# Altium PCB MB_RELAY.PcbDoc
Units mm, origin at the board's own origin, x right, y up, seen from the top; angles counter-clockwise.
Board outline 132.99 x 83.97 mm, 2 copper layers (Top Layer, Bottom Layer); 36 components, 46 nets, 228 pads, 0 vias.
Unrouted connection lines stored in the file: 22.
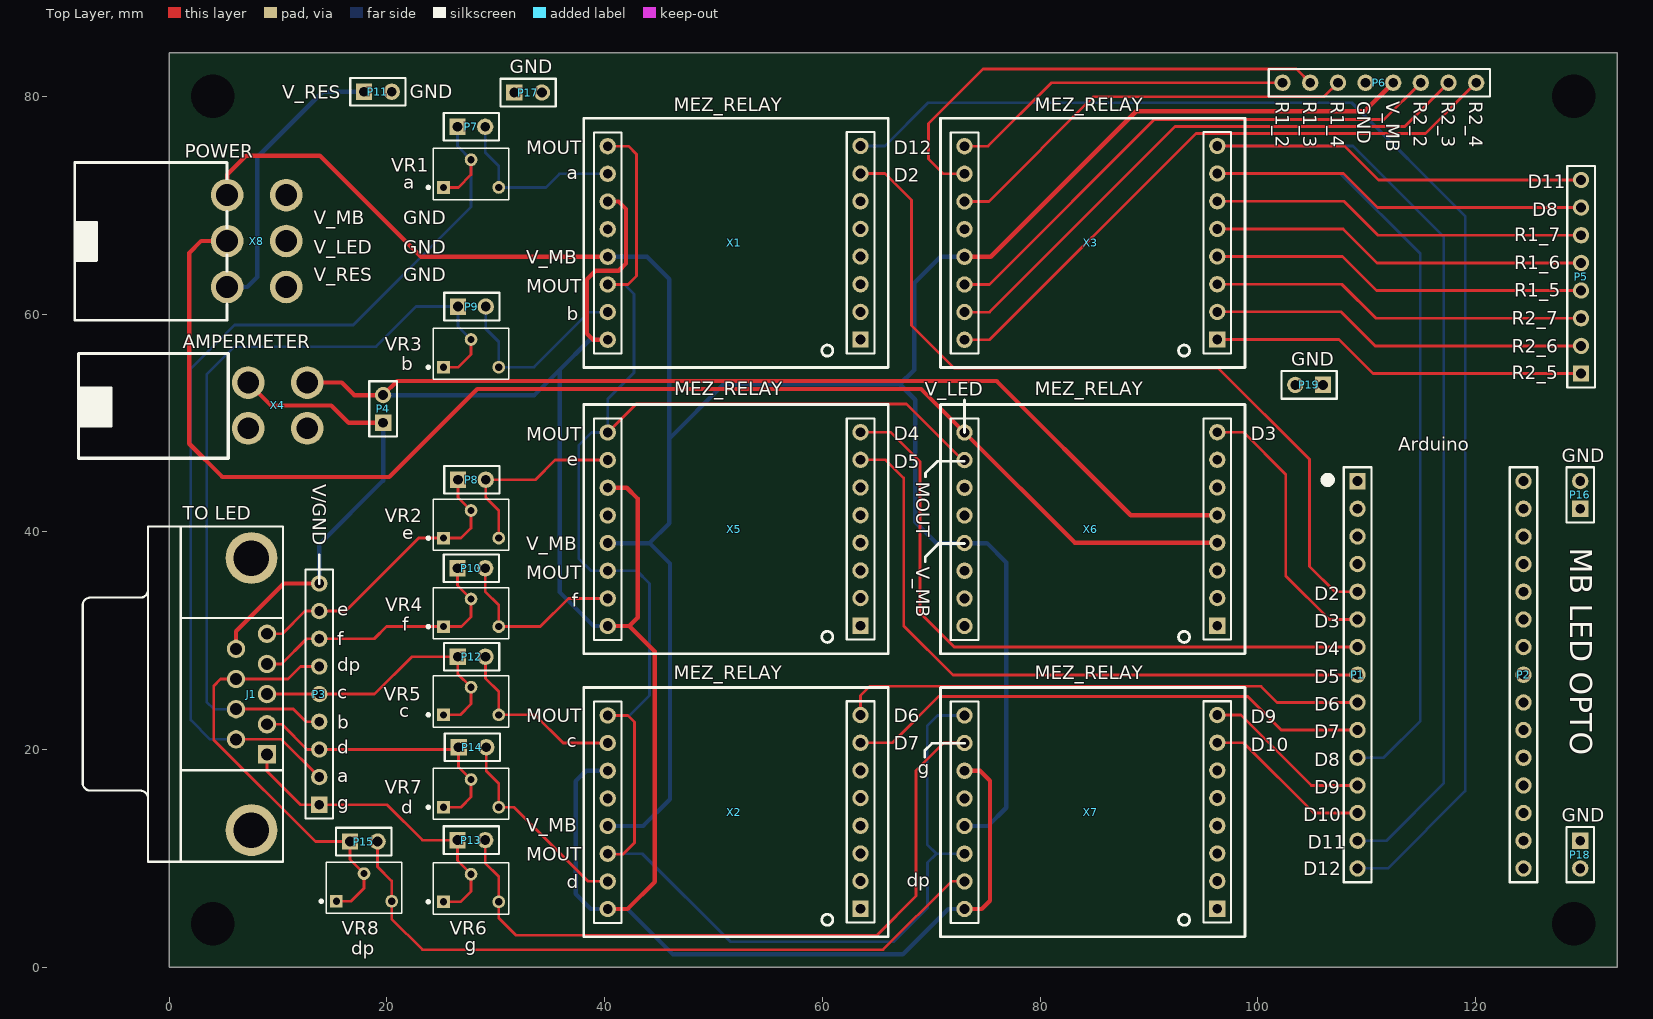
[diagram p0: Top Layer view]
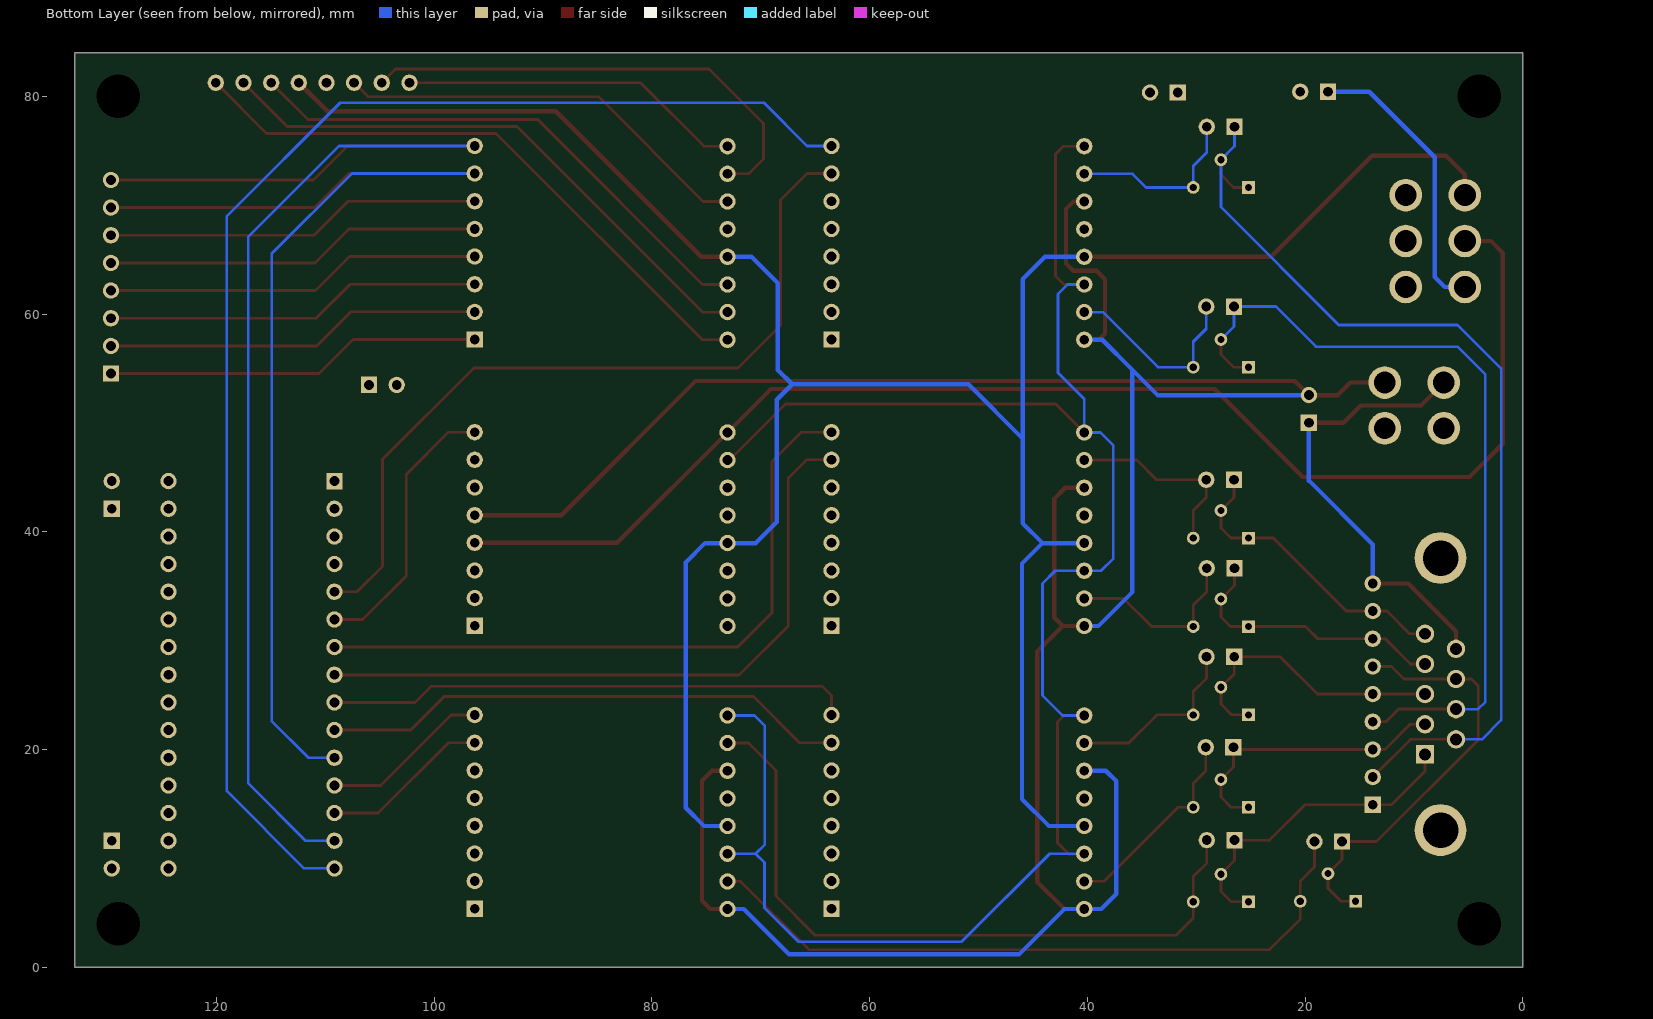
[diagram p1: Bottom Layer view, seen from below]

## Layer stack, top to bottom
Top Solder: solder mask 0.0102, Solder Resist, Dk 3.5
Top Layer: signal copper 0.0356
Dielectric 1: dielectric 0.32, FR-4, Dk 4.8
Bottom Layer: signal copper 0.0356
Bottom Solder: solder mask 0.0102, Solder Resist, Dk 3.5

## Board outline
0,83.972 0,0 132.994,0 132.994,83.972

## Design rules (kind name [scope] priority, off if disabled: settings)
Clearance Clearance_1 [All] p1: gap=0.254 ignorepadtopadclearanceinfootprint=FALSE except(0: Arc-Hole Track-Hole SMDPad-Hole THPad-Hole Via-Hole Fill-Hole Poly-Hole Region-Hole Text-Hole)
Clearance [All] p2: gap=0.254 ignorepadtopadclearanceinfootprint=FALSE except(0: Arc-Hole Track-Hole SMDPad-Hole THPad-Hole Via-Hole Fill-Hole Poly-Hole Region-Hole Text-Hole)
PolygonConnect [All] p1: connectstyle=Relief reliefconductorwidth=0.254 reliefentries=4 polygonreliefangle="90 Angle" airgapwidth=0.254
RoutingVias [All] p1: holewidth=0.711 width=1.27 viastyle="Through Hole" minholewidth=0.711 minwidth=1.27 maxholewidth=0.711 maxwidth=1.27
SolderMaskExpansion [All] p1: expansion=0.102 istentingtop=FALSE
Width [All] p1: maxlimit=0.6 minlimit=0.254 preferedwidth=0.4 minimp=50.000000 maximp=50.000000 favimp=50.000000
30 further rules are at their usual default settings.

## Components (designator, comment, footprint, x,y, rotation, side; value= is the part's Value field where it differs from the comment)
J1 "D Connector 9" DSUB1.385-2H9 -1.928,25.097 r90 top
P1 "Header 15" HDR1X15#1 109.144,9.093 r90 top
P2 "Header 15" HDR1X15#2 124.384,9.093 r90 top
P3 "Header 9" HDR1X9 13.792,14.935 r90 top
P4 "Header 2" HDR1X2 19.66,50.013 r90 top
P5 "Header 8" HDR1X8#1 129.671,72.314 r270 top
P6 "Header 8" HDR1X8#2 120.036,81.237 r180 top
P7 "Header 2" HDR1X2 26.492,77.191 r0 top
P8 "GND" HDR1X2 26.543,44.78 r0 top
P9 "Header 2" HDR1X2 26.543,60.681 r0 top
P10 "GND" HDR1X2 26.492,36.652 r0 top
P11 "Header 2" HDR1X2 17.907,80.416 r0 top
P12 "Header 2" HDR1X2 26.518,28.524 r0 top
P13 "GND" HDR1X2 26.492,11.684 r0 top
P14 "Header 2" HDR1X2 26.594,20.218 r0 top
P15 "GND" HDR1X2 16.612,11.557 r0 top
P16 "GND" HDR1X2 129.591,42.113 r90 top
P17 "GND" HDR1X2 31.699,80.34 r0 top
P18 "GND" HDR1X2 129.591,11.633 r270 top
P19 "GND" HDR1X2 105.969,53.492 r180 top
VR1 "RES 3266W" "RES 3266W" 25.197,71.628 r0 top
VR2 "RES 3266W" "RES 3266W" 25.197,39.421 r0 top
VR3 "RES 3266W" "RES 3266W" 25.197,55.118 r0 top
VR4 "RES 3266W" "RES 3266W" 25.197,31.293 r0 top
VR5 "RES 3266W" "RES 3266W" 25.197,23.19 r0 top
VR6 "RES 3266W" "RES 3266W" 25.197,6.02 r0 top
VR7 "RES 3266W" "RES 3266W" 25.197,14.707 r0 top
VR8 "RES 3266W" "RES 3266W" 15.367,6.071 r0 top
X1 "MEZ_RELAY" MEZ_RELAY 63.5,57.658 r180 top
X2 "MEZ_RELAY" MEZ_RELAY 63.5,5.385 r180 top
X3 "MEZ_RELAY" MEZ_RELAY 96.266,57.658 r180 top
X4 "AMP_VOLTMETR" AMP_VOLTMETER 12.687,53.705 r270 top
X5 "MEZ_RELAY" MEZ_RELAY 63.5,31.369 r180 top
X6 "MEZ_RELAY" MEZ_RELAY 96.266,31.369 r180 top
X7 "MEZ_RELAY" MEZ_RELAY 96.266,5.385 r180 top
X8 "POWER" POWER 5.334,70.919 r90 top

## Footprints (in the part's own frame and the unit in brackets; to place one, negate y for a bottom-side part, rotate by r counter-clockwise, add the part's x,y. Pads: shape width x height; smd on the part's side, far side on the other; paste and mask are expansions set on the pad)
AMP_VOLTMETER [mm] "AMP_VOLTMETER"
  round 3 hole 2: 1(0,0) 2(0,-5.423) 3(4.2,-5.423) 4(4.2,0)
  silkscreen extent -2.66,-21 6.94,-7.25
DSUB1.385-2H9 [mm] "Connector; D Subminiature; 9 Position; Right Angle; Pitch 1.385 mm"
  rect 1.69x1.69 hole 1.09: 1(-5.54,-10.92)
  round 1.69 hole 1.09: 2(-2.77,-10.92) 3(0,-10.92) 4(2.77,-10.92) 5(5.54,-10.92) 6(-4.155,-8.08) 7(-1.385,-8.08) 8(1.385,-8.08) 9(4.155,-8.08)
  round 4.76 hole 3.26: 10(-12.495,-9.5) 11(12.495,-9.5)
  silkscreen extent -15.4,-12.4 15.4,6
HDR1X2 [mm] "Connector; Header; 2 Position"
  rect 1.5x1.5 hole 0.9: 1(0,0)
  round 1.5 hole 0.9: 2(2.54,0)
  silkscreen extent -1.27,-1.27 3.81,1.27
HDR1X8#1 [mm] "Connector; Header; 8 Position"
  round 1.5 hole 0.9: 1(0,0) 2(2.54,0) 3(5.08,0) 4(7.62,0) 5(10.16,0) 6(12.7,0) 7(15.24,0)
  rect 1.5x1.5 hole 0.9: 8(17.78,0)
  silkscreen extent -1.27,-1.27 19.05,1.27
HDR1X8#2 [mm] "Connector; Header; 8 Position"
  round 1.5 hole 0.9: 1(0,0) 2(2.54,0) 3(5.08,0) 4(7.62,0) 5(10.16,0) 6(12.7,0) 7(15.24,0) 8(17.78,0)
  silkscreen extent -1.27,-1.27 19.05,1.27
HDR1X9 [mm] "Connector; Header; 9 Position"
  rect 1.5x1.5 hole 0.9: 1(0,0)
  round 1.5 hole 0.9: 2(2.54,0) 3(5.08,0) 4(7.62,0) 5(10.16,0) 6(12.7,0) 7(15.24,0) 8(17.78,0) 9(20.32,0)
  silkscreen extent -1.27,-1.27 21.59,1.27
HDR1X15#1 [mm] "Connector; Header; 15 Position"
  round 1.5 hole 0.9: 1(0,0) 2(2.54,0) 3(5.08,0) 4(7.62,0) 5(10.16,0) 6(12.7,0) 7(15.24,0) 8(17.78,0) 9(20.32,0) 10(22.86,0) 11(25.4,0) 12(27.94,0) 13(30.48,0) 14(33.02,0)
  rect 1.5x1.5 hole 0.9: 15(35.56,0)
  silkscreen extent -1.27,-1.27 36.83,1.27
HDR1X15#2 [mm] "Connector; Header; 15 Position"
  round 1.5 hole 0.9: 1(0,0) 2(2.54,0) 3(5.08,0) 4(7.62,0) 5(10.16,0) 6(12.7,0) 7(15.24,0) 8(17.78,0) 9(20.32,0) 10(22.86,0) 11(25.4,0) 12(27.94,0) 13(30.48,0) 14(33.02,0) 15(35.56,0)
  silkscreen extent -1.27,-1.27 36.83,1.27
MEZ_RELAY [mm] "мезонин реле"
  rect 1.5x1.5 hole 0.9: 1(0,0)
  round 1.5 hole 0.9: 2(0,-2.54) 3(0,-5.08) 4(0,-7.62) 5(0,-10.16) 6(0,-12.7) 7(0,-15.24) 8(0,-17.78) 9(23.216,-17.755) 10(23.216,-15.215) 11(23.216,-12.675) 12(23.216,-10.135) 13(23.216,-7.595) 14(23.216,-5.055) 15(23.216,-2.515) 16(23.216,0.025)
  silkscreen extent -2.54,-20.32 25.43,2.57
POWER [mm] "POWER"
  round 3 hole 2: 1(0,0) 2(-4.217,0) 3(-8.435,0) 4(0,-5.422) 5(-4.217,-5.422) 6(-8.435,-5.422)
  silkscreen extent -11.5,0 3,14
"RES 3266W" [mm]
  rect 1.168x1.168 hole 0.66: 1(0,0)
  round 1.168 hole 0.66: 2(2.54,2.54) 3(5.08,0)
  silkscreen extent -1.48,-1.12 5.99,3.58, body extent -0.81,-1.02 5.89,3.48, height 8.77

## Part data
J1: "Receptacle Assembly, 9 Position, Right Angle", PackageDocument=O, DatasheetDocument=1-Sep-1999, Gender=Receptacle, LatestRevisionDate=17-Jul-2002, LatestRevisionNote="Re-released for DXP Platform.", Orientation="Right Angle", PackageReference=788750, Positions=9, Published=15-Jun-2001, Publisher="Altium Limited"
P1 P2: "Header, 15-Pin", LatestRevisionDate=17-Jul-2002, LatestRevisionNote="Re-released for DXP Platform.", Publisher="Altium Limited"
P3: "Header, 9-Pin", LatestRevisionDate=17-Jul-2002, LatestRevisionNote="Re-released for DXP Platform.", Publisher="Altium Limited"
P4 P7 P9 P11 P12 P14: "Header, 2-Pin", LatestRevisionDate=17-Jul-2002, LatestRevisionNote="Re-released for DXP Platform.", Publisher="Altium Limited"
P5 P6: "Header, 8-Pin", LatestRevisionDate=17-Jul-2002, LatestRevisionNote="Re-released for DXP Platform.", Publisher="Altium Limited"
P8 P10 P13 P15 P16 P17 P18 P19: library part "Header 2", "Header, 2-Pin", LatestRevisionDate=17-Jul-2002, LatestRevisionNote="Re-released for DXP Platform.", Publisher="Altium Limited"

## Free pads (board coordinates)
  round 0 hole 4: 0(4,80) 0(129,4) 0(129,80) 2(4,4)

## Nets (pads, with @x,y where several pads share a name; then routed paths per layer and width w, separated by ;. In a path a pad name is that pad's centre, name@x,y a point inside that pad or via, vN(x,y) a via of type N, cw(c..) or ccw(c..) an arc to the next point about the centre after c; other vN are vias at no path point)
a: J1.6 P3.2 P7.1 VR1.1 VR1.2 | length 90.4
  Top Layer w0.254: J1.6 10.326,20.942 P3.2 ; VR1.1 26.568,71.628 27.737,72.796 VR1.2
  Bottom Layer w0.254: J1.6 3.773,20.942 2,22.714 2,55 6,59 16.912,59 27.737,69.825 VR1.2 26.492,75.413 P7.1
a_1: P7.2 VR1.3 X1.10 | length 16.6
  Bottom Layer w0.254: P7.2 29.032,74.854 30.277,73.609 VR1.3 34.62,71.628 35.865,72.873 X1.10
b: J1.7 P3.4 P9.1 VR3.1 VR3.2 | length 74.8
  Top Layer w0.254: J1.7 6.164,23.724 11.405,23.724 12.573,22.555 P3.4 ; VR3.1 26.568,55.118 27.737,56.286 VR3.2
  Bottom Layer w0.254: J1.7 4.127,23.712 3.454,24.384 3.454,54.454 6,57 19,57 22.681,60.681 P9.1 26.543,58.852 VR3.2
b_1: P9.2 VR3.3 X1.15 | length 18.2
  Bottom Layer w0.254: P9.2 29.083,58.649 30.277,57.455 VR3.3 33.528,55.118 38.583,60.173 X1.15
c: J1.3 P3.5 P12.1 VR5.1 VR5.2 | length 26.7
  Top Layer w0.254: J1.3 13.791,25.097 P3.5 18.872,25.095 22.301,28.524 P12.1 26.518,26.949 VR5.2 27.737,24.181 26.746,23.19 VR5.1
c_1: P12.2 VR5.3 X2.10 | length 16.9
  Top Layer w0.254: P12.2 29.058,26.543 30.277,25.324 VR5.3 33.61,23.19 36.201,20.599 X2.10
d: J1.2 P3.3 P14.1 VR7.1 VR7.2 | length 26.3
  Top Layer w0.254: J1.2 10.363,22.327 12.675,20.015 P3.3 26.594,20.015 26.594,18.39 VR7.2 27.737,15.646 26.797,14.707 VR7.1
d_1: P14.2 VR7.3 X2.15 | length 18.8
  Top Layer w0.254: P14.2 29.134,18.034 30.277,16.891 VR7.3 31.693,14.707 38.501,7.899 X2.15
dp: J1.8 P3.6 P15.1 VR8.1 VR8.2 | length 39.6
  Top Layer w0.254: P3.6 12.065,27.635 10.911,26.482 J1.8 4.732,26.482 4.104,25.854 4.104,20.896 13.443,11.557 P15.1 16.612,9.906 VR8.2 17.907,7.264 16.713,6.071 VR8.1
dp_1: P15.2 VR8.3 X7.15 | length 64
  Top Layer w0.254: P15.2 19.152,9.246 20.447,7.95 VR8.3 20.447,4.453 23.274,1.626 65.583,1.626 71.857,7.899 X7.15
e: J1.5 P3.8 P8.1 VR2.1 VR2.2 | length 27.7
  Top Layer w0.254: J1.5 10.418,30.637 12.497,32.715 P3.8 16.231,32.715 22.936,39.421 VR2.1 26.822,39.421 27.737,40.335 VR2.2 26.543,43.155 P8.1
e_1: P8.2 VR2.3 X5.10 | length 17.8
  Top Layer w0.254: VR2.3 30.277,41.973 29.083,43.167 P8.2 33.655,44.78 35.458,46.584 X5.10
f: J1.4 P3.7 P10.1 VR4.1 VR4.2 | length 25.5
  Top Layer w0.254: J1.4 10.341,27.867 12.649,30.175 P3.7 18.847,30.175 19.964,31.293 VR4.1 26.848,31.293 27.737,32.182 VR4.2 26.492,35.077 P10.1
f_1: P10.2 VR4.3 X5.15 | length 17
  Top Layer w0.254: P10.2 29.032,34.519 30.277,33.274 VR4.3 34.087,31.293 36.678,33.884 X5.15
g: J1.1 P3.1 P13.1 VR6.1 VR6.2 | length 29.8
  Top Layer w0.254: J1.1 8.992,18.008 12.065,14.935 P3.1 20.015,14.935 23.266,11.684 P13.1 26.492,9.804 VR6.2 27.737,6.985 26.772,6.02 VR6.1
g_1: P13.2 VR6.3 X7.10 | length 65.2
  Top Layer w0.254: P13.2 29.032,9.601 30.277,8.357 VR6.3 30.277,4.523 31.854,2.946 64.999,2.946 68.605,6.553 68.605,18.085 71.12,20.599 X7.10
GND: P1.12 P2.14 P6.5 P11.2 P16.1 P16.2 P17.1 P17.2 P18.1 P18.2 P19.1 P19.2 X1.12 X2.12 X3.12 X5.12 X6.6 X6.11 X6.12 X7.12 X8.4 X8.5 X8.6
IN1: P1.1 X1.8 | length 127.1
  Bottom Layer w0.254: X1.8 65.735,75.438 69.698,79.4 108.61,79.4 119.024,68.986 119.024,16.18 111.938,9.093 P1.1
IN2: P1.11 X1.7 | length 74
  Top Layer w0.254: X1.7 65.735,72.898 68.174,70.46 68.174,58.953 72.085,55.042 96.342,55.042 104.724,46.66 104.724,36.83 107.061,34.493 P1.11
IN3: P1.7 X2.8 | length 48.4
  Top Layer w0.254: X2.8 63.5,24.968 64.338,25.806 100.279,25.806 101.752,24.333 P1.7
IN4: P1.6 X2.7 | length 48.7
  Top Layer w0.254: X2.7 66.421,20.625 70.663,24.867 99.06,24.867 102.133,21.793 P1.6
IN5: P1.9 X5.8 | length 62
  Top Layer w0.254: X5.8 66.269,49.149 68.961,46.457 68.961,32.563 72.111,29.413 P1.9
IN6: P1.8 X5.7 | length 61.8
  Top Layer w0.254: X5.7 65.811,46.609 67.462,44.958 67.462,31.369 71.984,26.848 P1.8@109.144,26.848
IN7: P1.4 X7.8 | length 15.6
  Top Layer w0.254: X7.8 98.45,23.165 104.902,16.713 P1.4
IN8: P1.3 X7.7 | length 15.6
  Top Layer w0.254: X7.7 98.679,20.625 105.131,14.173 P1.3
IN9: P1.10 X6.8 | length 25.5
  Top Layer w0.254: X6.8 98.679,49.149 102.54,45.288 102.54,35.966 106.553,31.953 P1.10
IN10: P1.2 P5.1 X3.8 | length 119.2
  Top Layer w0.254: X3.8 107.95,75.438 111.074,72.314 P5.1
  Bottom Layer w0.254: X3.8 108.712,75.438 117.069,67.081 117.069,16.916 111.785,11.633 P1.2
IN11: P1.5 P5.2 X3.7 | length 106.5
  Top Layer w0.254: X3.7 107.848,72.898 110.973,69.774 P5.2
  Bottom Layer w0.254: X3.7 107.544,72.898 114.91,65.532 114.91,22.631 111.531,19.253 P1.5
MASTER_OUT: X1.9 X1.14 X2.9 X2.14 X5.9 X5.14 X6.10 X7.9 X7.14 | length 179.9
  Top Layer w0.254: X2.9 42.139,23.139 42.748,22.53 42.748,11.448 41.689,10.389 X2.14@40.335,10.389 ; X5.9 42.901,51.74 67.716,51.74 72.873,46.584 X6.10 ; X1.14 42.139,62.713 42.926,63.5 42.926,74.676 42.189,75.413 X1.9
  Bottom Layer w0.254: X2.14 43.461,10.439 51.538,2.362 66.548,2.362 69.647,5.461 69.647,9.627 70.46,10.439 ; X2.9 42.291,23.139 44.12,24.968 44.12,35.255 42.951,36.424 X5.14 38.76,36.424 37.617,37.567 37.617,47.93 38.811,49.124 X5.9 40.284,52.197 42.697,54.61 42.697,61.849 41.834,62.713 X1.14 ; X7.14 70.46,10.439 ; X7.9 70.587,23.139 69.621,22.174 69.621,11.278 70.46,10.439
R1_2: P6.8 X3.9 | length 31.6
  Top Layer w0.254: X3.9 75.218,75.413 81.042,81.237 P6.8
R1_3: P6.7 X3.10 | length 44.8
  Top Layer w0.254: X3.10 71.127,72.873 69.75,74.25 69.75,77.5 74.75,82.5 103.533,82.5 P6.7
R1_4: P6.6 X3.11 | length 38.8
  Top Layer w0.254: X3.11 75.286,70.333 84.912,79.959 106.058,79.959 P6.6
R1_5: P5.5 X3.4 | length 34.7
  Top Layer w0.254: X3.4 107.772,65.278 110.896,62.154 P5.5
R1_6: P5.4 X3.5 | length 34.7
  Top Layer w0.254: X3.5 107.823,67.818 110.947,64.694 P5.4
R1_7: P5.3 X3.6 | length 34.7
  Top Layer w0.254: X3.6 107.899,70.358 111.023,67.234 P5.3
R2_2: P6.3 X3.14 | length 49.6
  Top Layer w0.254: X3.14 75.336,62.713 90.475,77.851 111.57,77.851 P6.3
R2_3: P6.2 X3.15 | length 53.2
  Top Layer w0.254: X3.15 75.336,60.173 92.38,77.216 113.475,77.216 P6.2
R2_4: P6.1 X3.16 | length 56.8
  Top Layer w0.254: X3.16 75.362,57.633 94.31,76.581 115.38,76.581 P6.1
R2_5: P5.8 X3.1 | length 34.7
  Top Layer w0.254: X3.1 107.442,57.658 110.566,54.534 P5.8
R2_6: P5.7 X3.2 | length 34.7
  Top Layer w0.254: X3.2 107.645,60.198 110.769,57.074 P5.7
R2_7: P5.6 X3.3 | length 34.7
  Top Layer w0.254: X3.3 107.696,62.738 110.82,59.614 P5.6
V_LED: X6.4 X6.9 X8.2 | length 126.3
  Top Layer w0.4: X8.2 2.947,66.701 1.854,65.608 1.854,48.082 4.902,45.034 20.218,45.034 28.296,53.111 69.063,53.111 X6.9 83.185,38.989 X6.4
V_LED/GND_FROM_A: P4.2 X1.11 X1.16 X2.11 X2.16 X4.1 X5.11 X5.16 X6.5 X7.11 X7.16 | length 273.6
  Top Layer w0.4: X4.1 15.866,53.705 17.018,52.553 P4.2 20.955,53.848 75.997,53.848 88.316,41.529 X6.5 ; X2.16 42.113,5.359 44.602,7.849 44.602,29.007 42.266,31.344 ; X5.16 42.266,31.344 ; X5.11 42.037,44.044 43.028,43.053 43.028,32.106 42.266,31.344 ; X1.16 38.938,57.633 38.379,58.191 38.379,63.195 39.167,63.983 41.3,63.983 41.961,64.643 41.961,69.647 41.275,70.333 X1.11 ; X7.16 74.625,5.359 75.387,6.121 75.387,17.145 74.473,18.059 X7.11
  Bottom Layer w0.4: P4.2 33.553,52.553 35.865,54.864 ; X2.11 38.303,18.059 37.338,17.094 37.338,6.756 38.735,5.359 X2.16 42.113,5.359 46.279,1.194 67.386,1.194 71.552,5.359 X7.16 ; X5.16 38.989,31.344 35.865,34.468 35.865,54.864 ; X1.16 38.633,57.633 35.865,54.864
V_LED/GND_TO_A: J1.9 P3.9 P4.1 X4.2 | length 42.2
  Top Layer w0.4: J1.9 6.152,30.866 10.541,35.255 P3.9 ; X4.2 9.369,51.6 14.9,51.6 16.487,50.013 P4.1
  Bottom Layer w0.4: P3.9 13.792,38.837 19.66,44.704 P4.1
V_MB: P6.4 X1.13 X2.13 X3.13 X5.13 X6.13 X7.13 X8.1 | length 242.6
  Top Layer w0.4: X8.1 5.334,72.796 7.087,74.549 13.843,74.549 23.139,65.253 X1.13 ; X3.13 75.463,65.253 88.824,78.613 109.792,78.613 P6.4
  Bottom Layer w0.4: X5.13 44.12,38.964 ; X1.13 43.891,65.253 45.949,63.195 45.949,48.565 ; X2.13@40.31,12.979 43.536,12.979 45.999,15.443 45.999,37.084 44.12,38.964 ; X7.13 75.209,12.979 76.886,14.656 76.886,37.186 75.108,38.964 X6.13 70.46,38.964 68.529,40.894 68.529,52.121 67.107,53.543 ; X3.13 70.841,65.253 68.428,62.84 68.428,54.864 67.107,53.543 ; 44.12,38.964 45.949,40.792 45.949,48.565 ; 45.949,48.565 50.927,53.543 67.107,53.543
V_RESERVE: P11.1 X8.3 | length 26.4
  Bottom Layer w0.4: X8.3 7.184,62.484 8.1,63.4 8.1,74.394 14.122,80.416 P11.1
pads on no net: J1.10 J1.11 P1.13 P1.14 P1.15 P2.1 P2.2 P2.3 P2.4 P2.5 P2.6 P2.7 P2.8 P2.9 P2.10 P2.11 P2.12 P2.13 P2.15 X1.1 X1.2 X1.3 X1.4 X1.5 X1.6 X2.1 X2.2 X2.3 X2.4 X2.5 X2.6 X4.3 X4.4 X5.1 X5.2 X5.3 X5.4 X5.5 X5.6 X6.1 X6.2 X6.3 X6.7 X6.14 X6.15 X6.16 X7.1 X7.2 X7.3 X7.4 X7.5 X7.6

## Polygon pours and split planes (outlines as drawn)
no net on Bottom Layer "NONET_L02_P-001" (solid, remove dead copper, pour order 44): 0.076,84.049 0.125,84 0.028,84

## Other copper
Bottom Layer:
  pour cut-out: 0,0 0,8 8,8 8,0
  pour cut-out: 133,0 133,8 125,8 125,0
  pour cut-out: 133,84 133,76 125,76 125,84
  pour cut-out: 0,76 8,76 8,84 0,84

## Silkscreen, mask and mechanical layers (free items; w line width, h text height)
Top Overlay:
  lines w0.254: 13.792,35.255 13.792,37.871 ; 69.4,19.3 69.4,19.9 70.074,20.574 73.05,20.574 ; 69.444,37.25 69.444,37.694 70.688,38.938 73.05,38.938 ; 69.472,45.061 69.472,45.399 70.555,46.482 73.025,46.482 ; 73.05,49.124 73.05,52.1
  lines w1.1: 106.503,44.771 cw(c106.403,44.771) 106.502,44.78
  text "GND" at 22.123,79.807 h1.25
  text "V_RES" at 10.389,79.781 h1.25
  text "R1_2" at 101.621,79.553 h1.25 r270
  text "R1_3" at 104.161,79.553 h1.25 r270
  text "R1_4" at 106.701,79.553 h1.25 r270
  text "GND" at 109.114,79.553 h1.25 r270
  text "V_MB" at 111.781,79.553 h1.25 r270
  text "R2_2" at 114.321,79.553 h1.25 r270
  text "R2_3" at 116.861,79.553 h1.25 r270
  text "R2_4" at 119.401,79.553 h1.25 r270
  text "D12" at 66.573,74.676 h1.25
  text "MOUT" at 32.794,74.651 h1.25
  text "a" at 36.543,72.365 h1.25
  text "D2" at 66.573,72.136 h1.25
  text "D11" at 124.782,71.552 h1.25
  text "a" at 21.514,71.526 h1.25
  text "D8" at 125.198,68.994 h1.25
  text "V_MB" at 13.31,68.25 h1.25
  text "GND" at 21.488,68.25 h1.25
  text "R1_7" at 123.532,66.69 h1.25
  text "V_LED" at 13.31,65.557 h1.25
  text "GND" at 21.488,65.557 h1.25
  text "V_MB" at 32.794,64.618 h1.25
  text "R1_6" at 123.532,64.132 h1.25
  text "V_RES" at 13.31,62.992 h1.25
  text "GND" at 21.488,62.992 h1.25
  text "MOUT" at 32.794,61.951 h1.25
  text "R1_5" at 123.532,61.573 h1.25
  text "b" at 36.543,59.411 h1.25
  text "R2_7" at 123.324,59.015 h1.25
  text "AMPERMETER" at 1.245,56.845 h1.25
  text "R2_6" at 123.324,56.457 h1.25
  text "b" at 21.336,54.813 h1.25
  text "R2_5" at 123.324,54.013 h1.25
  text "V_LED" at 69.418,52.502 h1.25
  text "D4" at 66.573,48.387 h1.25
  text "D3" at 99.322,48.387 h1.25
  text "MOUT" at 32.794,48.362 h1.25
  text "Arduino" at 112.878,47.447 h1.25
  text "e" at 36.543,46.076 h1.25
  text "D5" at 66.573,45.847 h1.25
  text "MOUT" at 68.605,44.605 h1.25 r270
  text "V/GND" at 13.183,44.348 h1.25 r270
  text "TO LED" at 1.237,41.123 h1.25
  text "e" at 21.438,39.294 h1.25
  text "MB LED OPTO" at 128.676,38.532 h2 r270
  text "V_MB" at 32.794,38.329 h1.25
  text "V_MB" at 68.605,36.797 h1.25 r270
  text "MOUT" at 32.794,35.662 h1.25
  text "D2" at 105.186,33.731 h1.25
  text "f" at 36.959,33.122 h1.25
  text "e" at 15.469,32.299 h1.25
  text "D3" at 105.186,31.191 h1.25
  text "f" at 21.412,30.912 h1.25
  text "f" at 15.469,29.566 h1.25
  text "D4" at 105.186,28.651 h1.25
  text "dp" at 15.469,27.178 h1.25
  text "D5" at 105.186,26.111 h1.25
  text "c" at 15.469,24.689 h1.25
  text "D6" at 105.186,23.571 h1.25
  text "c" at 21.133,22.962 h1.25
  text "D6" at 66.573,22.53 h1.25
  text "MOUT" at 32.794,22.505 h1.25
  text "D9" at 99.322,22.403 h1.25
  text "b" at 15.469,21.93 h1.25
  text "D7" at 105.186,21.031 h1.25
  text "c" at 36.543,20.219 h1.25
  text "D7" at 66.573,19.99 h1.25
  text "D10" at 99.322,19.863 h1.25
  text "d" at 15.469,19.609 h1.25
  text "D8" at 105.186,18.491 h1.25
  text "g" at 68.769,17.717 h1.25
  text "a" at 15.469,17.018 h1.25
  text "D9" at 105.186,15.951 h1.25
  text "g" at 15.469,14.503 h1.25
  text "d" at 21.336,14.097 h1.25
  text "D10" at 104.145,13.411 h1.25
  text "V_MB" at 32.794,12.472 h1.25
  text "D11" at 104.561,10.871 h1.25
  text "MOUT" at 32.794,9.805 h1.25
  text "D12" at 104.145,8.468 h1.25
  text "dp" at 67.745,7.392 h1.25
  text "d" at 36.543,7.265 h1.25
  text "g" at 27.178,1.499 h1.25
  text "dp" at 16.713,1.168 h1.25
Mechanical 1:
  the board outline again, w0.254